# Altium PCB MV-LED.PcbDoc
Units mm, origin at the board's own origin, x right, y up, seen from the top; angles counter-clockwise.
Board outline 150 x 40 mm, 2 copper layers (Top Layer, Bottom Layer); 18 components, 61 nets, 171 pads, 27 vias.
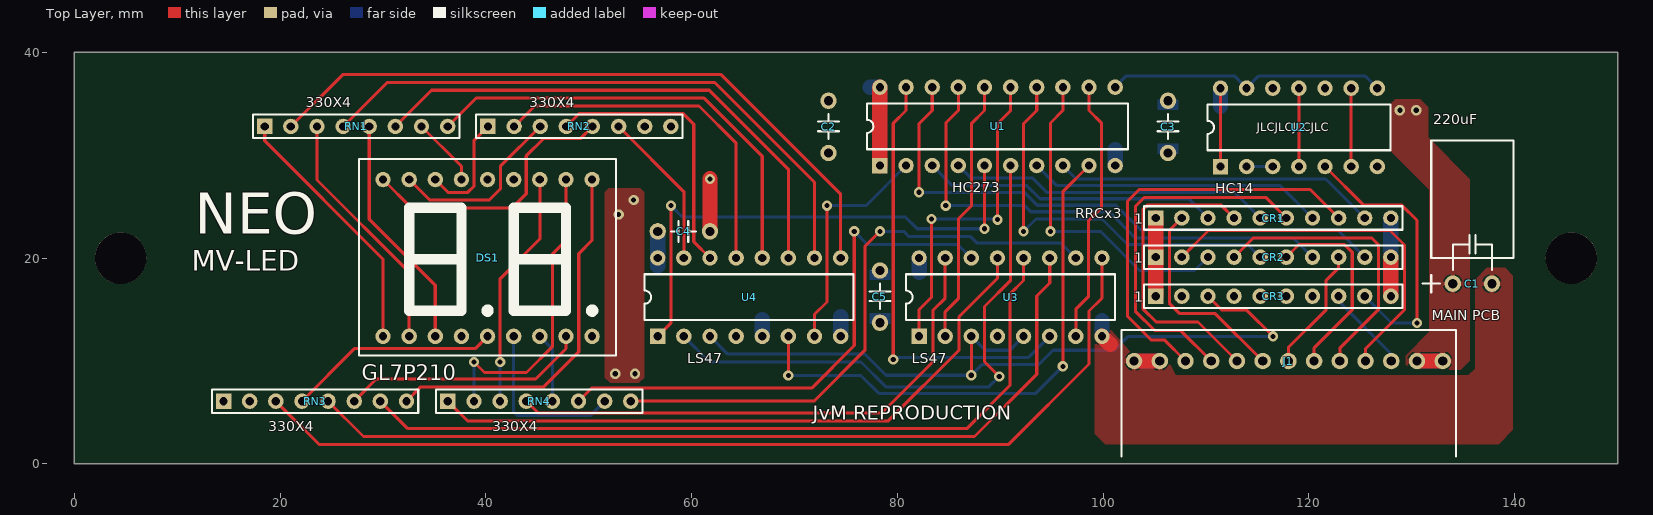
[diagram p0: Top Layer view]
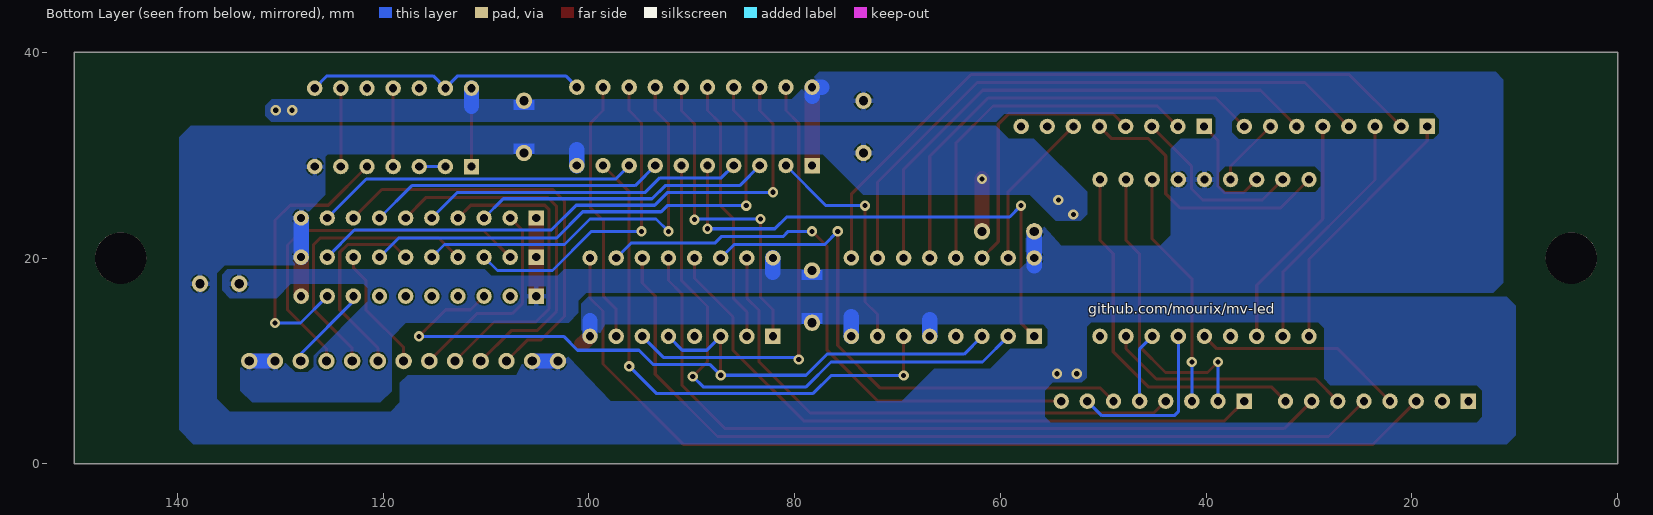
[diagram p1: Bottom Layer view, seen from below]
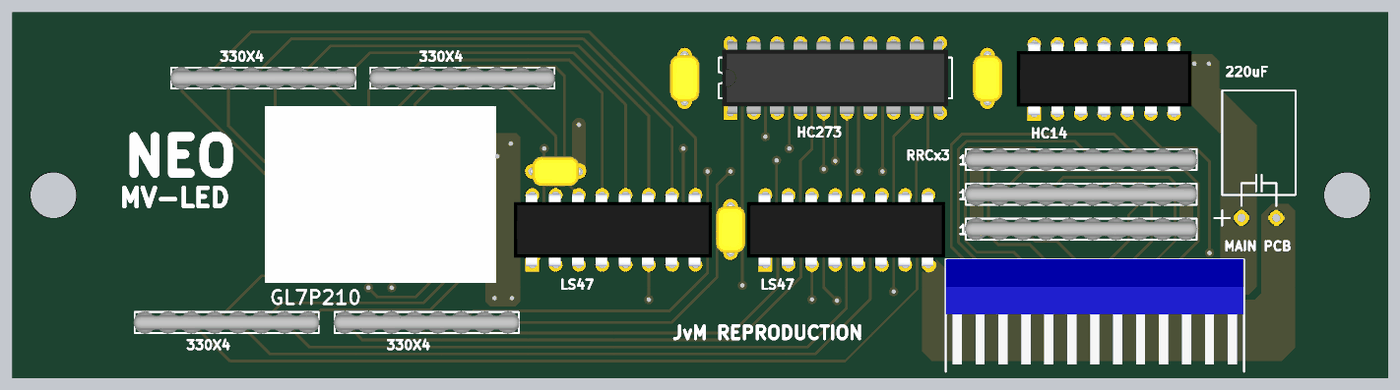
[diagram p2: 3D render of the assembled board from above, using the file's embedded part models]

## Layer stack, top to bottom
Top Solder: solder mask 0.0102, Solder Resist, Dk 3.5
Top Layer: signal copper 0.0356
Dielectric 1: dielectric 0.32, FR-4, Dk 4.8
Bottom Layer: signal copper 0.0356
Bottom Solder: solder mask 0.0102, Solder Resist, Dk 3.5

## Board outline
0,0 150,0 150,40 0,40

## Design rules (kind name [scope] priority, off if disabled: settings)
BoardOutlineClearance [All] p1: gap=0.2 ignorepadtopadclearanceinfootprint=FALSE
Clearance [All] p1: gap=0.15 ignorepadtopadclearanceinfootprint=FALSE except(0.127: SMDPad-SMDPad; 0.25: Arc-Hole Track-Hole SMDPad-Hole THPad-Hole Via-Hole Fill-Hole Poly-Hole Region-Hole Text-Hole)
ComponentClearance [All] p1: gap=0.127 collisioncheckmode=3 verticalgap=0.127 showdistances=TRUE
DiffPairsRouting [All] p1: maxlimit=0.254 minlimit=0.127 mostfreqgap=0.127 toplayer_minwidth=0.127 toplayer_maxwidth=25.4 toplayer_prefwidth=0.127 bottomlayer_minwidth=0.127 bottomlayer_maxwidth=25.4 bottomlayer_prefwidth=0.127 maxuncoupledlength=12.7
Height [All] p1: minheight=0 maxheight=1816.048 prefheight=12.7
HoleSize [All] p1: absolutevalues=TRUE maxlimit=6.3 minlimit=0.3 maxpercent=80.000 minpercent=20.000
HoleToHoleClearance [All] p1: gap=0.25 allowstackedmicrovias=FALSE
MinimumAnnularRing [All] p1: minimumring=0.076
MinimumSolderMaskSliver [All] p1: minsoldermaskwidth=0
PlaneClearance [All] p1: clearance=0.127
PlaneConnect PlaneConnectPowerPads [InPadClass('PowerPads')] p1: planeconnectstyle=Direct reliefexpansion=0.508 reliefentries=4 reliefconductorwidth=0.254 reliefairgap=0.254
PlaneConnect [All] p2: pad.planeconnectstyle=Relief pad.reliefexpansion=0.3 pad.reliefentries=4 pad.reliefconductorwidth=0.127 pad.reliefairgap=0.127 via.planeconnectstyle=Direct via.reliefexpansion=0.3 via.reliefentries=4 via.reliefconductorwidth=0.127 via.reliefairgap=0.127
PolygonConnect PolygonConnectPowerPads [All vs (InPadClass('PowerPads'))] p1: connectstyle=Direct reliefconductorwidth=0.254 reliefentries=4 polygonreliefangle="90 Angle" airgapwidth=0.254
PolygonConnect [All] p2: thpad.connectstyle=Relief thpad.reliefconductorwidth=0.5 thpad.reliefentries=4 thpad.polygonreliefangle="90 Angle" thpad.airgapwidth=0.15 smdpad.connectstyle=Relief smdpad.reliefconductorwidth=0.127 smdpad.reliefentries=4 smdpad.polygonreliefangle="90 Angle" smdpad.airgapwidth=0.127 via.connectstyle=Direct via.reliefconductorwidth=0.127 via.reliefentries=4 via.polygonreliefangle="90 Angle" via.airgapwidth=0.127
RoutingVias [All] p1: holewidth=0.3 width=0.6 viastyle="Through Hole" minholewidth=0.3 minwidth=0.6 maxholewidth=0.6 maxwidth=6.6
SilkToSilkClearance [All] p1: silktosilkclearance=0
SilkToSolderMaskClearance [IsPad] p1: minsilkscreentomaskgap=0.127 clearancetoexposedcopper=TRUE
SolderMaskExpansion [All] p1: expansion=0.075
Width [All] p1: maxlimit=25.4 minlimit=0.127 preferedwidth=0.127 minimp=50.000000 maximp=50.000000 favimp=50.000000
20 further rules are at their usual default settings.

## Components (designator, comment, footprint, x,y, rotation, side; value= is the part's Value field where it differs from the comment)
C1 "CapPol3.8" CapPol3.8_RA 135.885,17.521 r0 top locked value=220uF
C2 "CapCer0.2" CapCer0.2 73.3,35.3 r270 top locked value=100nF
C3 "CapCer0.2" CapCer0.2 106.3,35.3 r270 top locked value=100nF
C4 "CapCer0.2" CapCer0.2 56.7,22.6 r0 top locked value=100nF
C5 "CapCer0.2" CapCer0.2 78.3,18.8 r270 top locked value=100nF
CR1 "CRE401" SIP10 105.1,23.9 r0 top locked
CR2 "CRE401" SIP10 105.1,20.1 r0 top locked
CR3 "CRE401" SIP10 105.1,16.3 r0 top locked
DS1 "LB-602VA2" LB-602VA2 30,12.4 r0 top locked
J1 "BS13P-SHF" "JST BS13P-SHF-1AA" 133,10 r180 top locked
RN1 "4x330R" SIP8 18.5,32.8 r0 top locked
RN2 "4x330R" SIP8 40.2,32.8 r0 top locked
RN3 "4x330R" SIP8 14.5,6.1 r0 top locked
RN4 "4x330R" SIP8 36.3,6.1 r0 top locked
U1 "74HC273" DIP20 78.3,29 r90 top locked
U2 "74HC14" DIP14 111.4,28.9 r90 top locked
U3 "74LS47" DIP16 82.1,12.4 r90 top locked
U4 "74LS47" DIP16 56.7,12.4 r90 top locked

## Footprints (in the part's own frame and the unit in brackets; to place one, negate y for a bottom-side part, rotate by r counter-clockwise, add the part's x,y. Pads: shape width x height; smd on the part's side, far side on the other; paste and mask are expansions set on the pad)
CapCer0.2 [mm]
  round 1.6 hole 0.9: 1(0,0) 2(5.08,0)
  silkscreen extent 1.27,-1.02 3.73,1.02, body extent -0.25,-1.58 5.34,1.6, height 7.81
CapPol3.8_RA [mm]
  round 1.6 hole 0.9: 1(-1.9,0) 2(1.9,0)
  silkscreen extent -4.85,-0.85 4,13.9, body extent -4.07,1.6 3.93,13.6, height 8
DIP14 [mm]
  rect 1.5x1.5 hole 0.8: 1(0,0)
  round 1.5 hole 0.8: 2(0,-2.54) 3(0,-5.08) 4(0,-7.62) 5(0,-10.16) 6(0,-12.7) 7(0,-15.24) 8(7.62,-15.24) 9(7.62,-12.7) 10(7.62,-10.16) 11(7.62,-7.62) 12(7.62,-5.08) 13(7.62,-2.54) 14(7.62,0)
  silkscreen extent 1.58,-16.51 6.04,1.27, body extent -0.13,-17.14 7.75,1.91, height 4.19
DIP16 [mm]
  rect 1.5x1.5 hole 0.8: 1(0,0)
  round 1.5 hole 0.8: 2(0,-2.54) 3(0,-5.08) 4(0,-7.62) 5(0,-10.16) 6(0,-12.7) 7(0,-15.24) 8(0,-17.78) 9(7.62,-17.78) 10(7.62,-15.24) 11(7.62,-12.7) 12(7.62,-10.16) 13(7.62,-7.62) 14(7.62,-5.08) 15(7.62,-2.54) 16(7.62,0)
  silkscreen extent 1.58,-19.05 6.04,1.27, body extent -0.13,-19.58 7.75,2.01, height 4.19
DIP20 [mm]
  rect 1.5x1.5 hole 0.8: 1(0,0)
  round 1.5 hole 0.8: 2(0,-2.54) 3(0,-5.08) 4(0,-7.62) 5(0,-10.16) 6(0,-12.7) 7(0,-15.24) 8(0,-17.78) 9(0,-20.32) 10(0,-22.86) 11(7.62,-22.86) 12(7.62,-20.32) 13(7.62,-17.78) 14(7.62,-15.24) 15(7.62,-12.7) 16(7.62,-10.16) 17(7.62,-7.62) 18(7.62,-5.08) 19(7.62,-2.54) 20(7.62,0)
  silkscreen extent 1.58,-24.13 6.04,1.27, body extent -0.12,-23.71 7.75,0.89, height 4.36
"JST BS13P-SHF-1AA" [mm] "JST HVQ Series, 2.5mm Pitch 13 Way 1 Row Right Angle PCB Header, Through Hole, Solder Termination"
  round 1.6 hole 0.9: 1(0,0) 2(2.5,0) 3(5,0) 4(7.5,0) 5(10,0) 6(12.5,0) 7(15,0) 8(17.5,0) 9(20,0) 10(22.5,0) 11(25,0) 12(27.5,0) 13(30,0)
  silkscreen extent -1.27,-3 31.24,9.27, body extent -1.25,-3 31.25,8.5, height 5.6
LB-602VA2 [mm] "Double Digits LED Numeric Display"
  round 1.5 hole 0.8: 1(0,0) 2(2.54,0) 3(5.08,0) 4(7.62,0) 5(10.16,0) 6(12.7,0) 7(15.24,0) 8(17.78,0) 9(20.32,0) 10(20.32,15.24) 11(17.78,15.24) 12(15.24,15.24) 13(12.7,15.24) 14(10.16,15.24) 15(7.62,15.24) 16(5.08,15.24) 17(2.54,15.24) 18(0,15.24)
  silkscreen extent -2.34,-1.88 22.66,17.22, body extent -2.34,-1.85 22.66,17.15, height 8
SIP8 [mm]
  rect 1.5x1.5 hole 0.8: 1(0,0)
  round 1.5 hole 0.8: 2(2.54,0) 3(5.08,0) 4(7.62,0) 5(10.16,0) 6(12.7,0) 7(15.24,0) 8(17.78,0)
  silkscreen extent -1.14,-1.14 18.92,1.14, body extent -1.27,-1.25 19,1.24, height 4.95
SIP10 [mm]
  rect 1.5x1.5 hole 0.8: 1(0,0)
  round 1.5 hole 0.8: 2(2.54,0) 3(5.08,0) 4(7.62,0) 5(10.16,0) 6(12.7,0) 7(15.24,0) 8(17.78,0) 9(20.32,0) 10(22.86,0)
  silkscreen extent -1.14,-1.14 24,1.14, body extent -1.27,-1.25 24.08,1.24, height 4.95

## Part data
C1: "Polarized Capacitor, 3.8mm Pitch, 8mm Width", Voltage=10V
C2 C3 C4 C5: "Capacitor (THT), Ceramic, 5,08mm Pitch", Voltage=50V
CR1 CR2 CR3: "RRC Array"
DS1: "Double Digits LED Numeric Display"
J1: library part "JST BS13P-SHF-1AA", "JST HVQ Series, 2.5mm Pitch 13 Way 1 Row Right Angle PCB Header THT", Pitch=2.54mm
RN1 RN2 RN3 RN4: library part SIL8_4RES_330R, "Parallel Resistor Network 4x330R"
U1: "Octal D Type FLIP-FLOP with Clear,"
U2: "Hex Schmitt-Trigger Inverters"
U3 U4: "BCD-to-Seven-Segment Decoder/Driver"

## Free pads (board coordinates)
  round 5 hole 5 unplated: H(4.5,20) H(145.5,20)

## Via types
v1: diameter 1, hole 0.5, Top Layer to Bottom Layer, tented both sides, 27 vias

## Nets (pads, with @x,y where several pads share a name; then routed paths per layer and width w, separated by ;. In a path a pad name is that pad's centre, name@x,y a point inside that pad or via, vN(x,y) a via of type N, cw(c..) or ccw(c..) an arc to the next point about the centre after c; other vN are vias at no path point)
GND: C1.2 C2.2 C3.2 C4.2 C5.2 CR1.10 CR2.10 CR3.10 J1.12 J1.13 U1.10 U2.7 U3.8 U4.5 U4.8 | length 25.4
  Top Layer w1.5: C4.2 v1(61.78,27.7) ; U3.8 100.666,11.614 ; J1.13 J1.12 ; CR3.10 CR2.10
  Bottom Layer w1.5: U4.5 66.86,14.023 ; U4.8 74.48,14.288 ; U3.8 99.88,13.907 ; U1.10 101.16,30.54 ; J1.13 J1.12 ; CR2.10 CR1.10
  other v1: 52.578,8.758 54.483,8.758 52.9,24.252 54.356,25.649
NetCR1_2: CR1.2 J1.8 | length 20.2
  Top Layer w0.3: CR1.2 106.426,22.686 106.426,15.621 107.447,14.6 110.9,14.6 J1.8
NetCR1_3: CR1.3 U1.3 | length 28.9
  Bottom Layer w0.3: U1.3 85.334,27.046 92.583,27.046 93.853,25.776 108.304,25.776 CR1.3
NetCR1_4: CR1.4 J1.9 | length 30.4
  Top Layer w0.3: CR1.4 111.479,25.141 104.267,25.141 103.886,24.76 103.886,15.044 105.144,13.786 109.214,13.786 J1.9
NetCR1_5: CR1.5 U1.4 | length 31.5
  Bottom Layer w0.3: U1.4 87.112,27.808 93.091,27.808 94.499,26.4 112.76,26.4 CR1.5
NetCR1_6: CR1.6 J1.10 | length 35.4
  Top Layer w0.3: J1.10 107.551,12.949 105.029,12.949 103.124,14.854 103.124,25.014 104.013,25.903 115.797,25.903 CR1.6
NetCR1_7: CR1.7 U1.7 | length 28.9
  Bottom Layer w0.3: U1.7 95.494,27.046 117.194,27.046 CR1.7
NetCR1_8: CR1.8 J1.11 | length 40.8
  Top Layer w0.3: J1.11 105.94,12.06 104.648,12.06 102.362,14.346 102.362,25.522 103.505,26.665 120.115,26.665 CR1.8
NetCR1_9: CR1.9 U1.8 | length 31.5
  Bottom Layer w0.3: U1.8 97.38,27.7 121.62,27.7 CR1.9
NetCR2_2: CR2.2 J1.4 | length 36.1
  Top Layer w0.3: CR2.2 110.226,22.686 127.875,22.686 129.286,21.275 129.286,14.986 125.5,11.2 J1.4
NetCR2_3: CR2.3 U1.13 | length 31.9
  Top Layer w0.3: v1(94.869,22.6) 94.869,33.142 96.08,34.353 U1.13
  Bottom Layer w0.3: v1(94.869,22.6) 99.729,22.6 103.529,18.8 108.88,18.8 CR2.3
NetCR2_4: CR2.4 J1.5 | length 27.9
  Top Layer w0.3: CR2.4 114.586,21.966 126.111,21.966 126.746,21.331 126.746,14.986 123,11.24 J1.5
NetCR2_5: CR2.5 U1.14 | length 39.6
  Top Layer w0.3: v1(92.26,22.6) 92.26,33.073 93.54,34.353 U1.14
  Bottom Layer w0.3: v1(92.26,22.6) 93.472,23.812 99.881,23.812 102.362,21.331 114.029,21.331 CR2.5
NetCR2_6: CR2.6 J1.6 | length 19.3
  Top Layer w0.3: CR2.6 119.031,21.331 123.444,21.331 124.206,20.569 124.206,14.981 120.5,11.275 J1.6
NetCR2_7: CR2.7 U1.17 | length 49.7
  Top Layer w0.3: v1(84.7,25.1) 84.7,33.133 85.92,34.353 U1.17
  Bottom Layer w0.3: v1(84.7,25.1) 92.37,25.1 92.964,24.506 100.584,24.506 103.124,21.966 118.474,21.966 CR2.7
NetCR2_8: CR2.8 J1.7 | length 12.1
  Top Layer w0.3: J1.7 118,11.32 121.666,14.986 121.666,17.843 122.88,19.057 CR2.8
NetCR2_9: CR2.9 U1.18 | length 56.7
  Top Layer w0.3: v1(82.1,26.4) 82.1,33.073 83.38,34.353 U1.18
  Bottom Layer w0.3: v1(82.1,26.4) 92.34,26.4 93.599,25.141 101.222,25.141 103.635,22.728 122.792,22.728 CR2.9
NetCR3_3: CR3.3 U3.3 U3.5 U4.3 | length 75.8
  Top Layer w0.3: v1(87.18,8.62) U3.3 ; CR3.3 111.499,14.981 113.919,14.981 v1(116.5,12.4)
  Bottom Layer w0.3: U4.3 63.517,10.663 76.84,10.663 78.883,8.62 v1(87.18,8.62) 88.206,9.646 93.715,9.646 95.118,11.049 101.092,11.049 102.443,12.4 v1(116.5,12.4) ; U3.3 88.531,11.049 90.909,11.049 U3.5
NetCR3_8: CR3.8 J1.3 | length 8.4
  Bottom Layer w0.3: CR3.8 122.88,15.799 128,10.679 J1.3
NetCR3_9: CR3.9 U2.5 | length 27.2
  Top Layer w0.3: U2.5 125.319,25.141 129.032,25.141 130.5,23.673 v1(130.5,13.7)
  Bottom Layer w0.3: CR3.9 128.02,13.7 v1(130.5,13.7)
NetDS1_1: DS1.1 RN1.1 | length 25.2
  Top Layer w0.3: RN1.1 18.5,31.406 30,19.906 DS1.1
NetDS1_2: DS1.2 RN1.3 | length 24.1
  Top Layer w0.3: RN1.3 23.58,27.596 32.54,18.636 DS1.2
NetDS1_3: DS1.3 RN1.5 | length 23.1
  Top Layer w0.3: RN1.5 28.66,23.786 35.08,17.366 DS1.3
NetDS1_5: DS1.5 RN3.4 | length 20.6
  Top Layer w0.3: RN3.4 27.219,11.199 38.959,11.199 DS1.5
NetDS1_6: DS1.6 RN4.7 | length 16.9
  Bottom Layer w0.3: DS1.6 42.7,5.075 43.081,4.694 50.134,4.694 RN4.7
NetDS1_7: DS1.7 RN4.5 | length 6.8
  Bottom Layer w0.3: DS1.7 46.46,11.18 RN4.5
NetDS1_8: DS1.8 RN3.6 | length 23.9
  Top Layer w0.3: RN3.6 29.35,8.25 44.831,8.25 47.78,11.199 DS1.8
NetDS1_10: DS1.10 RN3.8 | length 36
  Top Layer w0.3: RN3.8 33.668,7.488 45.624,7.488 49.022,10.886 49.022,20.442 50.32,21.74 DS1.10
NetDS1_11: DS1.11 RN4.2 | length 29.7
  Top Layer w0.3: v1(38.84,9.901) 39.856,8.885 43.942,8.885 46.482,11.425 46.482,20.442 47.78,21.74 DS1.11
  Bottom Layer w0.3: RN4.2 v1(38.84,9.901)
NetDS1_12: DS1.12 RN4.3 | length 23.1
  Top Layer w0.3: v1(41.38,9.901) 41.38,18.007 45.24,21.867 DS1.12
  Bottom Layer w0.3: RN4.3 v1(41.38,9.901)
NetDS1_15: DS1.15 RN1.7 | length 6.8
  Top Layer w0.3: RN1.7 37.62,28.92 DS1.15
NetDS1_16: DS1.16 RN2.1 | length 10.9
  Top Layer w0.3: DS1.16 36.32,26.4 38.244,26.4 38.862,27.018 38.862,31.462 RN2.1
NetDS1_17: DS1.17 RN2.3 | length 17.8
  Top Layer w0.3: DS1.17 34.531,25.649 40.327,25.649 41.402,26.724 41.402,28.922 RN2.3
NetDS1_18: DS1.18 RN2.5 | length 26.9
  Top Layer w0.3: DS1.18 32.753,24.887 42.545,24.887 43.92,26.262 43.92,29.945 45.593,31.618 49.178,31.618 RN2.5
NetRN1_2: RN1.2 U4.9 | length 66.5
  Top Layer w0.3: RN1.2 26.081,37.841 62.865,37.841 74.48,26.226 U4.9
NetRN1_4: RN1.4 U4.10 | length 59
  Top Layer w0.3: RN1.4 30.399,37.079 62.23,37.079 71.94,27.369 U4.10
NetRN1_6: RN1.6 U4.11 | length 51.5
  Top Layer w0.3: RN1.6 34.717,36.317 61.722,36.317 69.4,28.639 U4.11
NetRN1_8: RN1.8 U4.12 | length 43.9
  Top Layer w0.3: RN1.8 39.035,35.555 61.214,35.555 66.86,29.909 U4.12
NetRN2_2: RN2.2 U4.13 | length 35.1
  Top Layer w0.3: RN2.2 44.733,34.793 60.706,34.793 64.32,31.179 U4.13
NetRN2_4: RN2.4 U4.14 | length 27
  Top Layer w0.3: RN2.4 49.051,34.031 59.182,34.031 60.198,33.015 60.198,21.602 U4.14
NetRN2_6: RN2.6 U4.15 | length 15.4
  Top Layer w0.3: RN2.6 59.24,26.46 U4.15
NetRN3_3: RN3.3 U3.9 | length 94.8
  Top Layer w0.3: RN3.3 23.78,1.9 90.805,1.9 98.62,9.715 98.62,14.856 99.88,16.116 U3.9
NetRN3_5: RN3.5 U3.11 | length 84.6
  Top Layer w0.3: RN3.5 28.098,2.662 87.498,2.662 93.54,8.704 93.54,16.319 94.8,17.579 U3.11
NetRN3_7: RN3.7 U3.12 | length 77
  Top Layer w0.3: RN3.7 32.416,3.424 86.736,3.424 90.932,7.62 90.932,16.505 92.26,17.833 U3.12
NetRN4_1: RN4.1 U3.13 | length 63.8
  Top Layer w0.3: RN4.1 38.214,4.186 79.116,4.186 85.979,11.049 85.979,14.294 89.72,18.035 U3.13
NetRN4_4: RN4.4 U3.15 | length 52.7
  Top Layer w0.3: RN4.4 45.072,4.948 78.481,4.948 83.439,9.906 83.439,14.915 84.64,16.116 U3.15
NetRN4_6: RN4.6 U3.14 | length 52.6
  Top Layer w0.3: RN4.6 50.261,7.361 71.656,7.361 75.8,11.505 v1(75.8,22.6)
  Bottom Layer w0.3: v1(75.8,22.6) 77.069,21.331 85.869,21.331 U3.14
NetRN4_8: RN4.8 U3.10 | length 57.1
  Top Layer w0.3: RN4.8 71.891,6.1 76.835,11.044 76.835,21.135 v1(78.3,22.6)
  Bottom Layer w0.3: v1(78.3,22.6) 80.615,22.6 81.122,22.093 87.122,22.093 87.757,21.458 95.902,21.458 U3.10
NetU1_2: U1.2 U4.7 | length 22.5
  Top Layer w0.3: U4.7 71.94,14.531 73.152,15.743 v1(73.152,25.1)
  Bottom Layer w0.3: v1(73.152,25.1) 76.94,25.1 U1.2
NetU1_5: U1.5 U4.1 | length 50.8
  Top Layer w0.3: U4.1 57.98,13.68 57.98,25.08 v1(58,25.1) ; v1(88.46,22.855) U1.5
  Bottom Layer w0.3: v1(58,25.1) 59.097,24.003 80.766,24.003 81.914,22.855 v1(88.46,22.855)
NetU1_6: U1.6 U4.2 | length 55.3
  Top Layer w0.3: v1(89.9,8.5) 88.46,9.94 88.46,15.303 91,17.843 U1.6
  Bottom Layer w0.3: U4.2 61.739,9.901 76.459,9.901 78.872,7.488 88.888,7.488 v1(89.9,8.5)
NetU1_9: U1.9 U4.6 | length 52.9
  Top Layer w0.3: v1(69.4,8.6) U4.6 ; v1(96.08,9.479) 96.08,26.46 U1.9
  Bottom Layer w0.3: v1(69.4,8.6) 76.443,8.6 78.19,6.853 93.454,6.853 v1(96.08,9.479)
NetU1_11: U1.11 U2.8 U2.13 | length 27.4
  Bottom Layer w0.3: U1.11 102.254,37.714 112.746,37.714 U2.13 115.134,37.714 125.446,37.714 U2.8
NetU1_12: U1.12 U3.7 | length 25.7
  Top Layer w0.3: U3.7 97.34,15.039 98.552,16.251 98.552,23.617 99.817,24.882 99.817,33.147 98.62,34.344 U1.12
NetU1_15: U1.15 U3.1 | length 32.1
  Top Layer w0.3: U3.1 82.1,14.98 83.312,16.192 v1(83.312,23.812) ; v1(89.72,23.744) 89.72,33.073 91,34.353 U1.15
  Bottom Layer w0.3: v1(83.312,23.812) 89.888,23.812 89.82,23.744 v1(89.72,23.744)
NetU1_16: U1.16 U3.2 | length 25.8
  Top Layer w0.3: U3.2 84.64,14.785 85.92,16.065 85.92,23.812 87.18,25.072 87.18,33.073 88.46,34.353 U1.16
NetU1_19: U1.19 U3.6 | length 43.1
  Top Layer w0.3: v1(79.593,10.155) 79.593,33.106 80.84,34.353 U1.19
  Bottom Layer w0.3: v1(79.593,10.155) 79.791,10.352 92.752,10.352 U3.6
NetU2_2: U2.2 U2.3 | length 2.5
  Bottom Layer w0.3: U2.2 U2.3
NetU2_4: U2.4 U2.11 | length 7.6
  Top Layer w0.3: U2.4 U2.11
NetU2_6: U2.6 U2.9 | length 7.6
  Top Layer w0.3: U2.6 U2.9
VCC: C1.1 C2.1 C3.1 C4.1 C5.1 CR1.1 CR2.1 CR3.1 DS1.13 DS1.14 J1.1 J1.2 U1.1 U1.20 U2.1 U2.14 U3.16 U4.16 | length 36.2
  Top Layer w0.3: U2.1 U2.14
  Top Layer w1.5: U1.1 U1.20 ; CR3.1 CR2.1 CR1.1 ; J1.2 J1.1
  Bottom Layer w1.5: 56.7,19.234 U4.16 C4.1 ; 77.343,36.62 U1.20 78.3,35.741 ; 82.1,18.606 U3.16 ; 111.4,34.772 U2.14 ; J1.2 J1.1
  other v1: 128.836,34.373 130.429,34.373
pads on no net: CR3.2 CR3.4 CR3.5 CR3.6 CR3.7 DS1.4 DS1.9 RN2.7 RN2.8 RN3.1 RN3.2 U2.10 U2.12 U3.4 U4.4

## Polygon pours and split planes (outlines as drawn)
GND on Top Layer "Top Layer-GND 1" (solid, pour order 1): 106.204,10.282 107.061,8.631 135.478,8.6 136.144,9.266 136.144,17.902 137.287,19.045 139.065,19.045 139.827,18.283 139.827,3.297 138.43,1.9 100.203,1.9 99.187,2.916 99.187,13.076 100.698,13.076 103.198,10.282
VCC on Top Layer "Top Layer-VCC" (solid, pour order 0): 129.413,9.647 129.413,10.536 131.699,12.822 131.699,26.665 128,30.364 128,35.031 128.397,35.428 130.81,35.428 131.572,34.666 131.572,31.745 135.636,27.681 135.636,10.028 134.747,9.139 129.921,9.139
GND on Top Layer "Top Layer-GND" (solid, pour order 9): 55.4,8.377 54.836,7.869 52.07,7.869 51.562,8.377 51.562,26.411 51.943,26.792 54.991,26.792 55.4,26.383
GND on Bottom Layer "Bottom Layer-GND" (solid, pour order 7): 55.846,13.584 98.378,13.584 99.548,11.679 100.711,11.679 100.711,15.573 100.047,16.237 10.781,16.237 9.906,15.362 9.906,2.789 10.795,1.9 138.43,1.9 139.827,3.297 139.827,31.745 138.684,32.888 60.452,32.888 59.182,31.618 56.747,31.618 51.562,26.433 51.562,24.252 52.197,23.617 54.61,23.617 57.15,26.157 73.33,26.157 77.267,30.094 125.349,30.094 125.603,29.84 125.603,26.157 127.254,24.506 127.254,19.496 127.451,19.299 135.378,19.299 136.144,18.533 136.144,6.345 134.874,5.075 119.267,5.075 118.364,5.978 118.364,7.869 117.602,8.631 107.061,8.631 106.024,10.661 102.238,10.661 97.852,6.1 69.587,6.1 66.421,9.266 60.96,9.266 59.055,11.171 55.753,11.171 55.372,11.552 55.372,13.11
VCC on Bottom Layer "Bottom Layer-VCC" (solid, pour order 5): 102.362,18.918 102.997,18.283 109.474,18.283 110.109,18.918 135.128,18.918 135.636,18.41 135.636,16.886 134.874,16.124 130.351,16.124 128.975,17.5 121.899,17.5 121.482,17.083 121.482,15.8 126.746,10.536 126.746,9.463 127.324,8.885 128.551,8.885 130.175,10.536 133.858,10.536 133.858,7.107 132.729,5.978 120.255,5.978 119.175,7.058 119.175,12.314 117.769,13.72 101.972,13.72 101.014,14.678 101.014,15.87 100.252,16.632 12.065,16.632 11.098,17.599 11.098,37.333 11.86,38.095 77.597,38.095 80.264,35.428 105.029,35.428 107.569,35.428 109.601,35.428 113.206,35.428 113.862,35.428 130.81,35.428 131.445,34.793 131.445,33.855 130.859,33.269 60.374,33.269 59.612,34.031 39.419,34.031 39.038,33.65 39.038,32.126 39.546,31.618 42.467,31.618 43.434,30.651 43.434,22.22 44.45,21.204 54.102,21.204 56.007,23.363 57.023,23.363 57.531,22.855 57.531,19.478 58.092,18.918

## Other copper
Bottom Layer:
  region net GND: 107.339,31.145 105.261,31.145 105.261,30.102 107.339,30.102
  rectangle net VCC: 105.261,34.375 107.339,35.418
  region net GND: 79.339,14.645 77.261,14.645 77.261,13.602 79.339,13.602
  rectangle net VCC: 77.261,17.875 79.339,18.918
  pour cut-out: 28.899,28.265 28.899,26.966 29.407,26.458 38.143,26.458 38.735,27.05 38.735,28.292 38.16,28.9 29.436,28.9 28.899,28.363
  pour cut-out: 17.399,33.425 17.399,32.126 17.907,31.618 36.83,31.618 37.465,32.253 37.465,33.269 36.674,34.06 17.936,34.06 17.399,33.523
  pour cut-out: 51.562,8.377 52.07,7.869 54.888,7.869 55.65,7.107 55.65,4.591 55.118,4.059 13.716,4.059 13.208,4.567 13.208,7.107 13.716,7.615 27.923,7.615 28.575,8.267 28.575,13.2 29.095,13.72 51.174,13.72 51.562,13.332

## Silkscreen, mask and mechanical layers (free items; w line width, h text height)
Top Overlay:
  text "330X4" at 22.496,34.666 h1
  text "330X4" at 44.196,34.666 h1
  text "220uF" at 132.08,33.015 h1
  text "JLCJLCJLCJLC" at 114.935,32.332 h0.8
  text "HC273" at 85.344,26.4 h1
  text "HC14" at 110.871,26.284 h1
  text "RRCx3" at 97.282,23.9 h1
  text "1" at 102.997,23.363 h1
  text "NEO" at 11.684,22.347 h4
  text "1" at 102.997,19.563 h1
  text "MV-LED" at 11.43,18.791 h2
  text "1" at 102.997,15.763 h1
  text "MAIN PCB" at 131.953,13.965 h1
  text "LS47" at 59.563,9.774 h1
  text "LS47" at 81.407,9.774 h1
  text "GL7P210" at 27.94,8.123 h1.5
  text "JvM REPRODUCTION" at 71.755,4.313 h1.4
  text "330X4" at 18.84,3.17 h1
  text "330X4" at 40.64,3.17 h1
Bottom Overlay:
  text "github.com/mourix/mv-led" at 51.435,14.6 h1
Mechanical 1:
  the board outline again, w0.1